# Altium PCB Socket_Power.PcbDoc
Units mm, origin at the board's own origin, x right, y up, seen from the top; angles counter-clockwise.
Board outline 89 x 24.5 mm, 2 copper layers (Top Layer, Bottom Layer), stack 1.58 mm thick; 15 components, 8 nets, 44 pads, 12 vias.
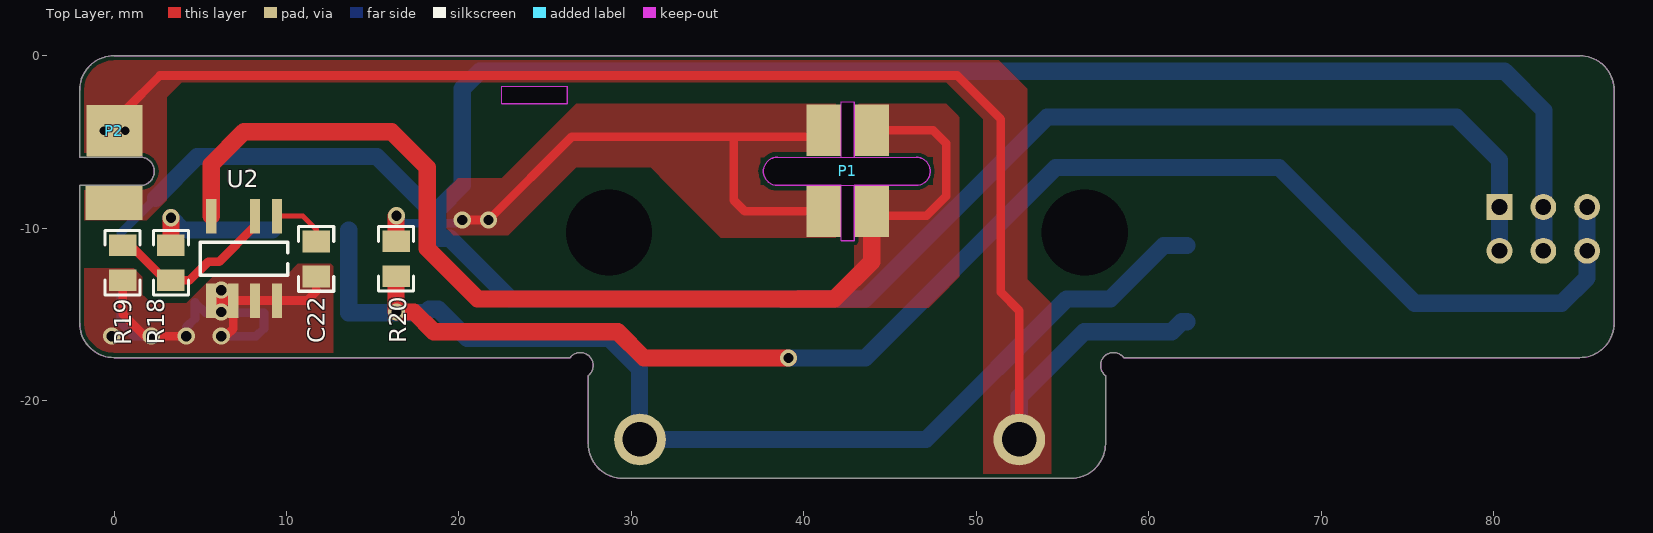
[diagram p0: Top Layer view]
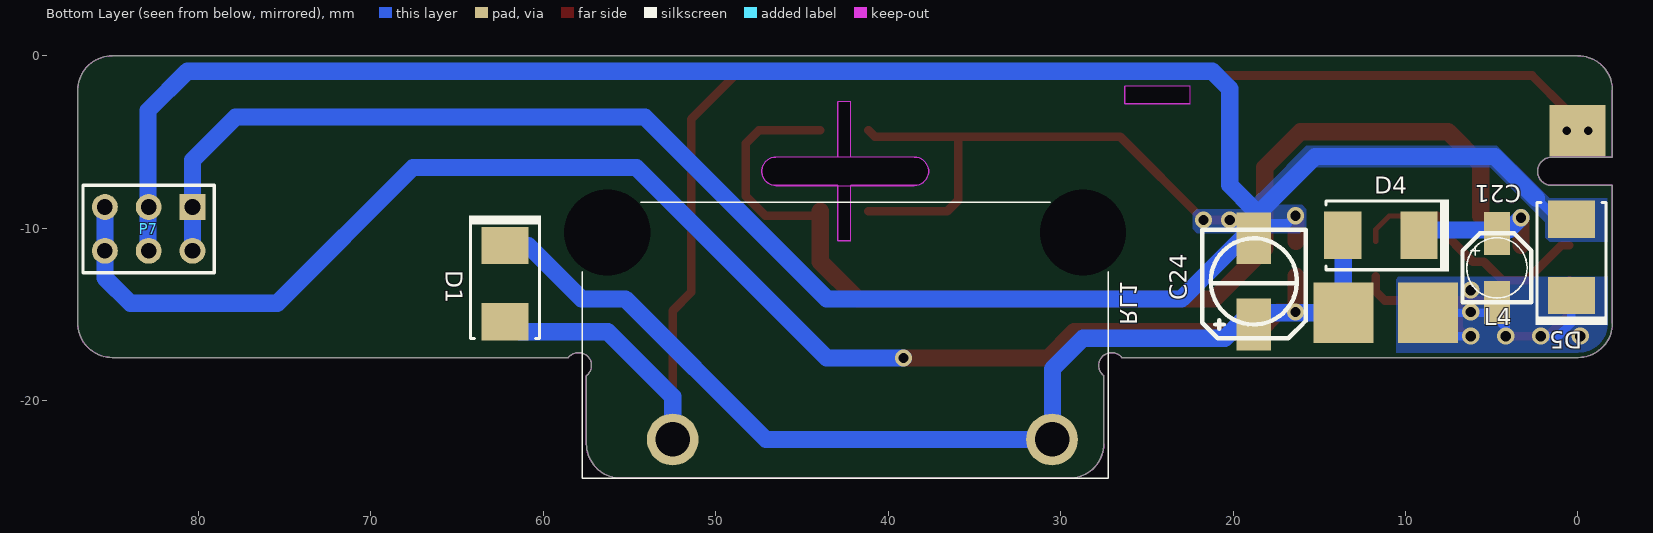
[diagram p1: Bottom Layer view, seen from below]
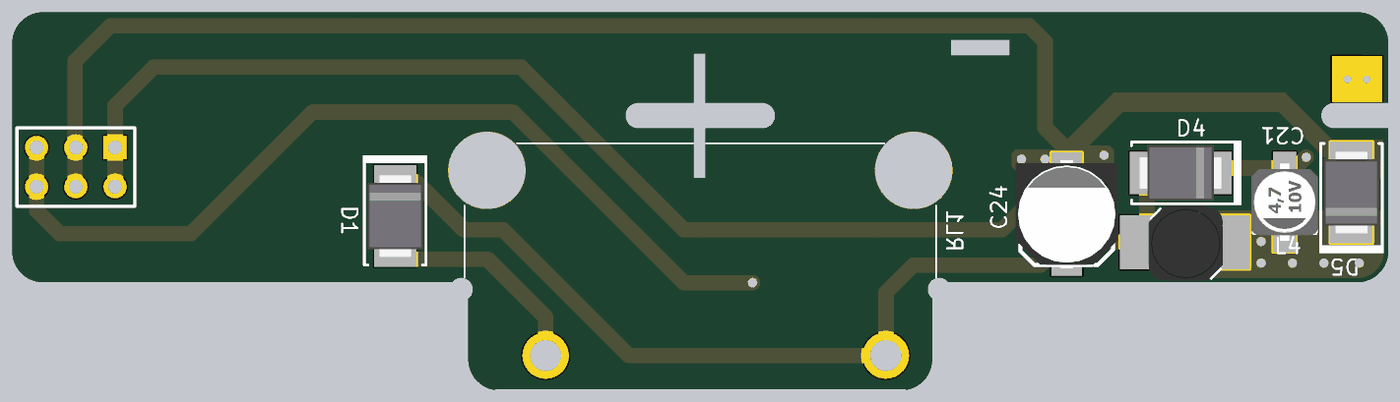
[diagram p2: 3D render of the assembled board from below, using the file's embedded part models]

## Layer stack, top to bottom
Top Solder: solder mask 0.0102, Solder Resist, Dk 3.5
Top Layer: signal copper 0.0356
Dielectric 1: dielectric 1.5086, FR-4, Dk 4.8
Bottom Layer: signal copper 0.0356
Bottom Solder: solder mask 0.0102, Solder Resist, Dk 3.5

## Board outline
0,-17.5 cw(c0,-15.5) -2,-15.5 -2,-7.52 1.52,-7.52 ccw(c1.52,-6.7) 1.52,-5.88 -2,-5.88 -2,-2 cw(c0,-2) 0,0 85,0 cw(c85,-2) 87,-2 87,-15.5 cw(c85,-15.5) 85,-17.5 58.552,-17.5 ccw(c57.96,-17.96) 57.5,-18.552 57.5,-22.5 cw(c55.5,-22.5) 55.5,-24.5 29.5,-24.5 cw(c29.5,-22.5) 27.5,-22.5 27.5,-18.552 ccw(c27.04,-17.96) 26.448,-17.5
cut-out: 22.479,-2.794 22.479,-1.778 26.289,-1.778 26.289,-2.794
cut-out: 38.478,-7.518 cw(c38.478,-6.698) 38.478,-5.878 42.164,-5.878 42.164,-2.667 42.926,-2.667 42.926,-5.878 46.518,-5.878 cw(c46.518,-6.698) 46.518,-7.518 42.926,-7.518 42.926,-10.729 42.164,-10.729 42.164,-7.518
cut-out: 46.518,-5.885 cw(c46.518,-6.705) 46.518,-7.525 38.478,-7.525 cw(c38.478,-6.705) 38.478,-5.885

## Design rules (kind name [scope] priority, off if disabled: settings)
Clearance Clearance_1 [InNet('GND')] p1: gap=0.3
Clearance [All] p2: gap=0.254
HoleSize [All] p1: absolutevalues=TRUE maxlimit=5 minlimit=0.01 maxpercent=80.000 minpercent=20.000
MinimumSolderMaskSliver [All] p1: minsoldermaskwidth=0.01
PolygonConnect [All] p1: connectstyle=Direct reliefconductorwidth=0.254 reliefentries=4 polygonreliefangle="90 Angle" airgapwidth=0.254
RoutingVias [All] p1: holewidth=0.3 width=0.6 viastyle="Through Hole" minholewidth=0.3 minwidth=0.6 maxholewidth=5 maxwidth=5
SilkToSilkClearance [All] p1: silktosilkclearance=0.1
SilkToSolderMaskClearance [IsPad] p1: minsilkscreentomaskgap=0.01 clearancetoexposedcopper=TRUE
SolderMaskExpansion [All] p1: expansion=0.102
Width [All] p1: maxlimit=5 minlimit=0.254 preferedwidth=0.254
26 further rules are at their usual default settings.

## Components (designator, comment, footprint, x,y, rotation, side; value= is the part's Value field where it differs from the comment)
C21 "10uF" TU_NHOM_10uF_MH 4.7,-12.3 r0 bottom
C22 "104" 0805_HV 11.726,-11.775 r90 top
C24 "220uF" TU_NHOM_2.5_MH 18.796,-13.081 r0 bottom
D1 "US1M-13-F" SMB 62.23,-13.208 r90 bottom
D4 "US1M-13-F" SMB 11.43,-10.414 r180 bottom
D5 "US1M-13-F" SMB 0.381,-11.684 r270 bottom
L4 "680uF" "Inductor 4.5x5" 10.9,-14.8 r180 bottom
P1 "Header 4" HDR1X4 38.833,-10.149 r0 top
P2 "Header 2" HDR1X2 1.533,-4.328 r180 top locked
P7 "Header 3X2" HDR2X3 80.348,-8.768 r0 bottom
R18 "13k" 0805_HV 3.3,-12 r90 top
R19 "2K" 0805_HV 0.5,-12 r90 top
R20 "3k3" 0805_HV 16.356,-11.769 r270 top
RL1 "Component_1" RELAY25AOMRON 30.498,-22.248 r0 bottom locked
U2 "LNK306" "SOP 7" 9.449,-9.293 r270 top

## Footprints (in the part's own frame and the unit in brackets; to place one, negate y for a bottom-side part, rotate by r counter-clockwise, add the part's x,y. Pads: shape width x height; smd on the part's side, far side on the other; paste and mask are expansions set on the pad)
0805_HV [mil] "0805 with 30mil clearance between pads"
  rect 50x63 smd: 1(-40,0) 2(40,0)
  silkscreen extent -74,-40 74,40, body extent -43,-29 43,29, height 57
HDR1X2 [mm] "Connector; Header; 2 Position"
  rect 2x3 hole 0.5: 1(0.884,0.017) 2(2.133,0.022)
HDR1X4 [mm] "Connector; Header; 4 Position"
  rect 2x3 smd: 1(5.109,1.132) 2(5.109,5.831) 3(2.315,1.132) 4(2.315,5.831)
HDR2X3 [mm] "Connector; Header; 3x2 Position"
  rect 1.5x1.5 hole 0.9: 1(0,0)
  round 1.5 hole 0.9: 2(0,2.54) 3(2.54,0) 4(2.54,2.54) 5(5.08,0) 6(5.08,2.54)
  silkscreen extent -1.27,-1.27 6.35,3.81
"Inductor 4.5x5" [mm]
  rect 3.5x3.5 smd: 1(2.2,-0.1) 2(-2.7,-0.1)
  body extent -2.6,-2.6 2.2,2.2, height 2
RELAY25AOMRON [mm]
  round 3 hole 2 paste+0: 1(0,0) 2(22,0)
  round 3 hole 5 paste+0: 3(25.8,-12) 4(-1.8,-12)
  silkscreen extent -3.25,-13.75 27.25,2.25
SMB [mm] "Molded Diode, 2-Leads, Body 5.4x3.6mm, IPC Medium Density, based on OnSemi component dimensions"
  rect 2.159x2.743 smd: 1(2.21,0) 2(-2.21,0)
  silkscreen extent -3.17,-2.08 3.94,2.08, body extent -2.7,-1.8 2.7,1.8, height 2.32
"SOP 7" [mm]
  rect 2x0.6 smd: 1(0,0) 2(0,-1.27) 4(0,-3.81) 5(4.9,-3.81) 6(4.9,-2.54) 7(4.9,-1.27) 8(4.9,0)
  silkscreen extent 1.52,-4.45 3.43,0.64, body extent -0.66,-4.38 5.39,0.52, height 1.36
TU_NHOM_2.5_MH [mm]
  rect 2x3 smd: 1(0,2.5) 2(0,-2.5)
  silkscreen extent -3,-3 3,3.3, body extent -3.3,-3.5 3.3,3.5, height 8.11
TU_NHOM_10uF_MH [mm]
  rect 1.5x2.5 smd: 1(0,-2) 2(0,2)
  silkscreen extent -2,-2 2,2, body extent -2.15,-2.5 2.15,2.5, height 5.4

## Part data
C21: library part TU_NHOM_10uF_25V_MH, "TU_NHOM_10uF_25V_MH"
C22: library part CM, "Cap SMD"
C24: library part TU_NHOM_220uF_25V_MH, "TU_NHOM_220uF_25V_MH"
D1 D4 D5: library part MURS160-13-F, "Diode, Ultrafast, 600V, 1A, SMB"
L4: library part "Inductor 4.5x5_MH"
P1: "Header, 4-Pin"
P2: "Header, 2-Pin"
P7: "Header, 3-Pin, Dual row"
R18 R19 R20: library part R, "Resistor 1/4W"
U2: library part Component_1

## Free pads (board coordinates)
  rect 3.3x2 smd paste+0: 5(0,-8.509)

## Via types
v1: diameter 1, hole 0.6, Top Layer to Bottom Layer, tented both sides, 12 vias

## Nets (pads, with @x,y where several pads share a name; then routed paths per layer and width w, separated by ;. In a path a pad name is that pad's centre, name@x,y a point inside that pad or via, vN(x,y) a via of type N, cw(c..) or ccw(c..) an arc to the next point about the centre after c; other vN are vias at no path point)
BP: C22.2 U2.1 | length 3.3
  Top Layer w0.3: U2.1 10.944,-9.293 11.726,-10.075 C22.2
FB: R18.1 R19.2 U2.2 | length 10.4
  Top Layer w0.5: R19.2 0.951,-10.984 2.983,-13.016 R18.1 4.383,-13.016 5.461,-11.938 6.096,-11.938 8.179,-9.855 U2.2
GND: C24.2 D5.2 P1.3 P1.4 P7.1 P7.2 P7.3 P7.4 R20.1 | length 214.8
  Top Layer w0.5: v1@16.356,-9.298 v1(16.383,-9.271) ; v1(20.193,-9.525) v1(21.717,-9.525) 26.543,-4.699 35.941,-4.699 ; P1.3 36.576,-9.017 35.941,-8.382 35.941,-4.699 ; P1.4 40.767,-4.699 35.941,-4.699
  Top Layer w1: R20.1 v1@16.356,-9.298
  Bottom Layer w0.5: D5.2@0.381,-10.287 2.413,-8.255 ; v1(16.383,-9.271) 16.812,-9.7 18.796,-9.7 v1@20.066,-9.7 ; P7.4 P7.4@82.931,-11.265
  Bottom Layer w1: 2.413,-8.255 4.826,-5.842 15.24,-5.842 18.415,-9.017 18.415,-9.271 C24.2@18.796,-9.652 ; P7.2 P7.1 80.348,-6.053 77.851,-3.556 54.102,-3.556 43.561,-14.097 22.987,-14.097 19.471,-10.581 C24.2 18.796,-9.7 C24.2@18.796,-9.652 ; P7.4@82.931,-11.265 82.931,-3.175 80.645,-0.889 21.209,-0.889 20.193,-1.905 20.193,-7.493 18.796,-8.89 C24.2@18.796,-9.652
NetC21_1: C21.1 D4.1 R18.2 | length 7.8
  Top Layer w1: R18.2 3.3,-9.4 v1(3.302,-9.398)
  Bottom Layer w1: v1(3.302,-9.398) 4.004,-10.1 D4.1@9.19,-10.1
RL1C: D1.2 P2.1 P2.2 pad.5 RL1.2 | length 86.9
  Top Layer w0.3: P2.2 P2.2@-0.595,-4.345
  Top Layer w0.5: P2.1 0.649,-3.161 2.667,-1.143 48.895,-1.143 51.435,-3.683 51.435,-13.716 52.498,-14.779 RL1.2
  Bottom Layer w1: RL1.2 52.498,-19.765 56.261,-16.002 61.341,-16.002 61.925,-15.418 D1.2
S: C21.2 C22.1 D5.1 L4.1 R19.1 U2.5 U2.6 U2.7 U2.8 | length 29.5
  Top Layer w0.5: R19.1 0.5,-14.978 1.778,-16.256 v1(2.159,-16.256) v1(4.191,-16.256) ; U2.5 U2.6 ; v1(6.223,-16.256) 6.477,-16.256 6.909,-15.824 U2.6 ; C22.1 11.726,-13.674 11.207,-14.193 U2.8 U2.7 U2.6
  Bottom Layer w0.5: D5.1 0.381,-15.494 1.143,-16.256 v1(2.159,-16.256) ; v1(4.191,-16.256) 4.191,-15.748 4.7,-15.239 C21.2 5.3,-14.9 L4.1 8.7,-15.811 8.255,-16.256 v1(6.223,-16.256)
  other v1: -0.127,-16.256 6.223,-14.859 6.223,-13.589
VCC_RELAY: C24.1 D1.1 D4.2 L4.2 P7.5 P7.6 R20.2 RL1.1 | length 148.5
  Top Layer w0.5: v1@16.356,-14.832 v1(16.383,-14.859)
  Top Layer w1: v1@16.356,-14.832 R20.2 ; v1(16.383,-14.859) 17.399,-14.859 18.542,-16.002 29.21,-16.002 30.734,-17.526 v1(39.116,-17.526)
  Bottom Layer w0.5: L4.2 L4.2@13.61,-14.89
  Bottom Layer w1: L4.2 18.088,-14.9 18.288,-14.7 18.8,-14.7 20.483,-16.383 28.702,-16.383 30.48,-18.161 30.48,-22.23 RL1.1 47.094,-22.248 55.245,-14.097 57.785,-14.097 60.884,-10.998 D1.1 ; L4.2@13.61,-14.89 D4.2@13.61,-10.1 ; v1(39.116,-17.526) 43.561,-17.526 54.61,-6.477 67.564,-6.477 75.438,-14.351 83.947,-14.351 85.428,-12.87 P7.6 P7.5
VIN: P1.1 P1.2 U2.4 | length 65.1
  Top Layer w0.5: P1.1@43.942,-9.271 47.117,-9.271 48.26,-8.128 48.26,-5.08 47.498,-4.318 P1.2
  Top Layer w1: U2.4 5.639,-6.299 7.533,-4.405 16.089,-4.405 18.161,-6.477 18.161,-11.176 21.082,-14.097 41.783,-14.097 43.942,-11.938 43.942,-9.271 P1.1
pads on no net: RL1.3 RL1.4

## Polygon pours and split planes (outlines as drawn)
VIN on Top Layer "Bottom Layer-No Net" (solid, pour order 12): 42.926,-2.794 48.26,-2.794 48.895,-3.429 49.022,-3.556 49.022,-9.144 49.022,-12.827 47.879,-13.97 47.244,-14.605 40.894,-14.605 37.846,-14.605 38.608,-14.605 39.624,-13.589 41.656,-13.589 42.926,-12.319 42.926,-7.518 47.473,-7.518 47.498,-7.493 47.498,-5.842 42.962,-5.842 42.926,-5.878
GND on Top Layer "Bottom Layer-No Net" (solid, pour order 10): 41.021,-2.794 34.29,-2.794 26.797,-2.794 22.479,-7.112 20.32,-7.112 19.939,-7.112 19.812,-7.239 19.304,-7.747 19.304,-8.128 19.304,-10.033 19.431,-10.16 19.685,-10.414 20.828,-10.414 22.86,-10.414 24.13,-9.144 26.797,-6.477 28.448,-6.477 31.115,-6.477 32.131,-7.493 35.179,-10.541 42.164,-10.541 42.164,-7.518 42.15,-7.532 38.478,-7.532 38.45,-7.504 38.264,-7.504 38.253,-7.493 37.465,-7.493 37.465,-5.842 37.501,-5.878 42.164,-5.878 42.164,-2.794
RL1C on Top Layer "Bottom Layer-No Net" (solid, remove dead copper, pour order 9): -2,-9.525 1.905,-9.525 2.921,-8.509 3.048,-8.382 3.048,-2.921 3.048,-2.413 3.81,-1.651 3.937,-1.524 5.334,-1.524 48.26,-1.524 50.419,-3.683 50.419,-20.574 50.419,-24.5 54.356,-24.5 54.356,-14.351 53.213,-13.208 52.959,-12.954 52.959,-9.144 52.959,-1.905 51.054,0 41.148,0 0,0 -1.512,-0.606 -2,-1.824 -2,-3.175 -2,-5.88 1.711,-5.887 1.732,-5.908 1.877,-5.908 2.136,-6.167 2.271,-6.389 2.326,-6.806 2.1,-7.28 -2,-7.52
S on Top Layer "Bottom Layer-No Net" (solid, remove dead copper, pour order 11): 12.7,-12.192 12.7,-17.526 12.674,-17.5 4.826,-17.5 4.826,-14.986 4.826,-13.716 5.334,-13.208 5.842,-12.7 7.112,-12.7 10.033,-12.7 10.668,-12.065 12.573,-12.065
S on Top Layer "Bottom Layer-No Net" (solid, remove dead copper, pour order 14): 4.953,-13.589 4.191,-14.351 3.81,-14.351 2.159,-14.351 1.778,-13.97 1.651,-13.843 1.651,-13.208 1.651,-12.827 1.27,-12.446 1.143,-12.319 -0.889,-12.319 -2,-12.319 -2,-15.907 -1.651,-16.256 -0.407,-17.5 2.159,-17.5 5.487,-17.5 5.588,-17.399
GND on Bottom Layer "Bottom Layer-No Net" (solid, remove dead copper, pour order 13): 16.002,-8.636 17.653,-8.636 17.78,-8.763 17.907,-8.89 18.669,-8.89 22.098,-8.89 22.352,-9.144 22.352,-9.652 22.352,-10.033 22.098,-10.287 20.574,-10.287 16.129,-10.287 15.748,-9.906 15.748,-8.89
S on Bottom Layer "Bottom Layer-No Net" (solid, remove dead copper, pour order 15): 10.414,-12.827 -2,-12.827 -2,-15.871 -1.978,-15.893 -1.978,-16.025 -0.583,-17.42 -0.503,-17.5 0.889,-17.5 10.414,-17.5 10.541,-17.373 10.541,-17.272 10.541,-12.954 10.414,-12.827
GND on Bottom Layer "Bottom Layer-No Net" (solid, remove dead copper, pour order 16): -2.032,-8.255 1.651,-8.255 2.54,-7.366 4.699,-5.207 8.128,-5.207 15.748,-5.207 18.034,-7.493 18.923,-8.382 18.796,-8.509 17.78,-8.509 17.272,-8.001 15.748,-6.477 12.954,-6.477 5.08,-6.477 3.556,-8.001 1.905,-9.652 1.905,-10.287 1.905,-10.541 1.651,-10.795 -2,-10.795

## Keep-outs
Keep-Out Layer:
  pour cut-out: 38.478,-7.518 cw(c38.478,-6.698) 38.478,-5.878 42.164,-5.878 42.164,-2.667 42.926,-2.667 42.926,-5.878 46.518,-5.878 cw(c46.518,-6.698) 46.518,-7.518 42.926,-7.518 42.926,-10.729 42.164,-10.729 42.164,-7.518
  lines w0.013: -2,-7.5 -2,-7.52 ; -2,-5.9 -2,-5.88 ; -2,-7.52 1.52,-7.52 ccw(c1.52,-6.7) 1.52,-5.88 -2,-5.88 ; -2,-7.52 -2,-15.5 ccw(c0,-15.5) 0,-17.5 26.448,-17.5 cw(c27.04,-17.96) 27.5,-18.552 27.5,-22.5 ccw(c29.5,-22.5) 29.5,-24.5 55.5,-24.5 ccw(c55.5,-22.5) 57.5,-22.5 57.5,-18.552 cw(c57.96,-17.96) 58.552,-17.5 85,-17.5 ccw(c85,-15.5) 87,-15.5 87,-2 ccw(c85,-2) 85,0 0,0 ccw(c0,-2) -2,-2 -2,-5.88 ; 22.479,-2.794 26.289,-2.794 26.289,-1.778 22.479,-1.778 22.479,-2.794 ; 38.478,-7.518 cw(c38.478,-6.698) 38.478,-5.878 42.164,-5.878 42.164,-2.667 42.926,-2.667 42.926,-5.878 46.518,-5.878 cw(c46.518,-6.698) 46.518,-7.518 42.926,-7.518 42.926,-10.729 42.164,-10.729 42.164,-7.518 38.478,-7.518

## Silkscreen, mask and mechanical layers (free items; w line width, h text height)
Mechanical 13:
  circle w0.013: c52.5,-22.25 r0.9
  circle w0.013: c56.3,-10.25 r2.5
  circle w0.013: c28.7,-10.25 r2.5
  circle w0.013: c85.43,-8.77 r0.45
  circle w0.013: c56.298,-10.248 r2.5
  circle w0.013: c85.428,-11.308 r0.45
  circle w0.013: c80.348,-11.308 r0.45
  circle w0.013: c82.888,-8.768 r0.45
  circle w0.013: c85.428,-8.768 r0.45
  circle w0.013: c80.348,-8.768 r0.45
  circle w0.013: c82.888,-11.308 r0.45
  circle w0.013: c28.698,-10.248 r2.5
  circle w0.013: c30.498,-22.248 r0.9
  circle w0.013: c52.498,-22.248 r0.9
  lines w0.01: 40.975,0.039 40.972,0.036 40.972,-4.37 ; 42.502,-7.9 42.502,-5.6 ; 44.146,0.03 44.117,0.001 44.117,-4.37 ; 40.972,-4.37 40.972,-9.03 44.117,-9.03 44.117,-4.37 ; 40.972,-4.37 44.117,-4.37
  lines w0.013: -2.002,-7.498 -2.002,-7.518 ; -2.002,-5.898 -2.002,-5.878 ; 1.698,-7.498 38.298,-7.498 ; 1.698,-5.898 38.298,-5.898 ; 12.911,-17.498 13.098,4.003 ; 13.898,4.003 14.085,-17.498 ; 22.137,-17.498 22.206,-7.498 ; 32.398,-24.698 32.649,4.08 ; 33.347,4.08 33.598,-24.698 ; 39.297,-5.876 45.697,-5.876 ; 46.648,-24.698 46.899,4.08 ; 46.698,-7.498 86.998,-7.498 ; 46.698,-5.898 86.998,-5.898 ; 47.597,4.08 47.848,-24.698 ; 70.911,-17.498 71.099,4.003 ; 71.898,4.003 72.085,-17.498 ; -2.002,-7.518 1.518,-7.518 ccw(c1.518,-6.698) 1.518,-5.878 -2.002,-5.878 ; -2.002,-7.518 -2.002,-15.498 ccw(c-0.002,-15.498) -0.002,-17.498 26.446,-17.498 cw(c27.039,-17.957) 27.498,-18.55 27.498,-22.498 ccw(c29.498,-22.498) 29.498,-24.498 55.498,-24.498 ccw(c55.498,-22.498) 57.498,-22.498 57.498,-18.55 cw(c57.958,-17.957) 58.55,-17.498 84.998,-17.498 ccw(c84.998,-15.498) 86.998,-15.498 86.998,-1.998 ccw(c84.998,-1.998) 84.998,0.002 -0.002,0.002 ccw(c-0.002,-1.998) -2.002,-1.998 -2.002,-5.878 ; -2,-15.5 ccw(c0,-15.5) 0,-17.5 26.448,-17.5 cw(c27.04,-17.959) 27.5,-18.552 27.5,-22.5 ccw(c29.5,-22.5) 29.5,-24.5 55.5,-24.5 ccw(c55.5,-22.5) 57.5,-22.5 57.5,-18.552 cw(c57.96,-17.959) 58.552,-17.5 85,-17.5 ccw(c85,-15.5) 87,-15.5 87,-2 ccw(c85,-2) 85,0 0,0 ccw(c0,-2) -2,-2 -2,-5.88 1.52,-5.88 cw(c1.52,-6.7) 1.52,-7.52 -2,-7.52 -2,-15.5 ; 22.95,-10.5 24.95,-12.5 29.95,-12.5 30.45,-12 30.45,-9 29.95,-8.5 26.95,-8.5 26.95,-3.9 24.95,-1.9 22.95,-1.9 22.95,-5.9 22.95,-10.5 ; 38.48,-7.52 cw(c38.48,-6.7) 38.48,-5.88 46.52,-5.88 cw(c46.52,-6.7) 46.52,-7.52 38.48,-7.52 ; 54.3,-7.5 58.3,-7.5 58.3,-12.25 54.32,-12.25 54.3,-7.5